# Altium PCB 160901137.PcbDoc
Units mm, origin at the board's own origin, x right, y up, seen from the top; angles counter-clockwise.
Board outline 150 x 90 mm, 2 copper layers (Top Layer, Bottom Layer); 112 components, 134 nets, 547 pads, 17 vias.
Unrouted connection lines stored in the file: 3.
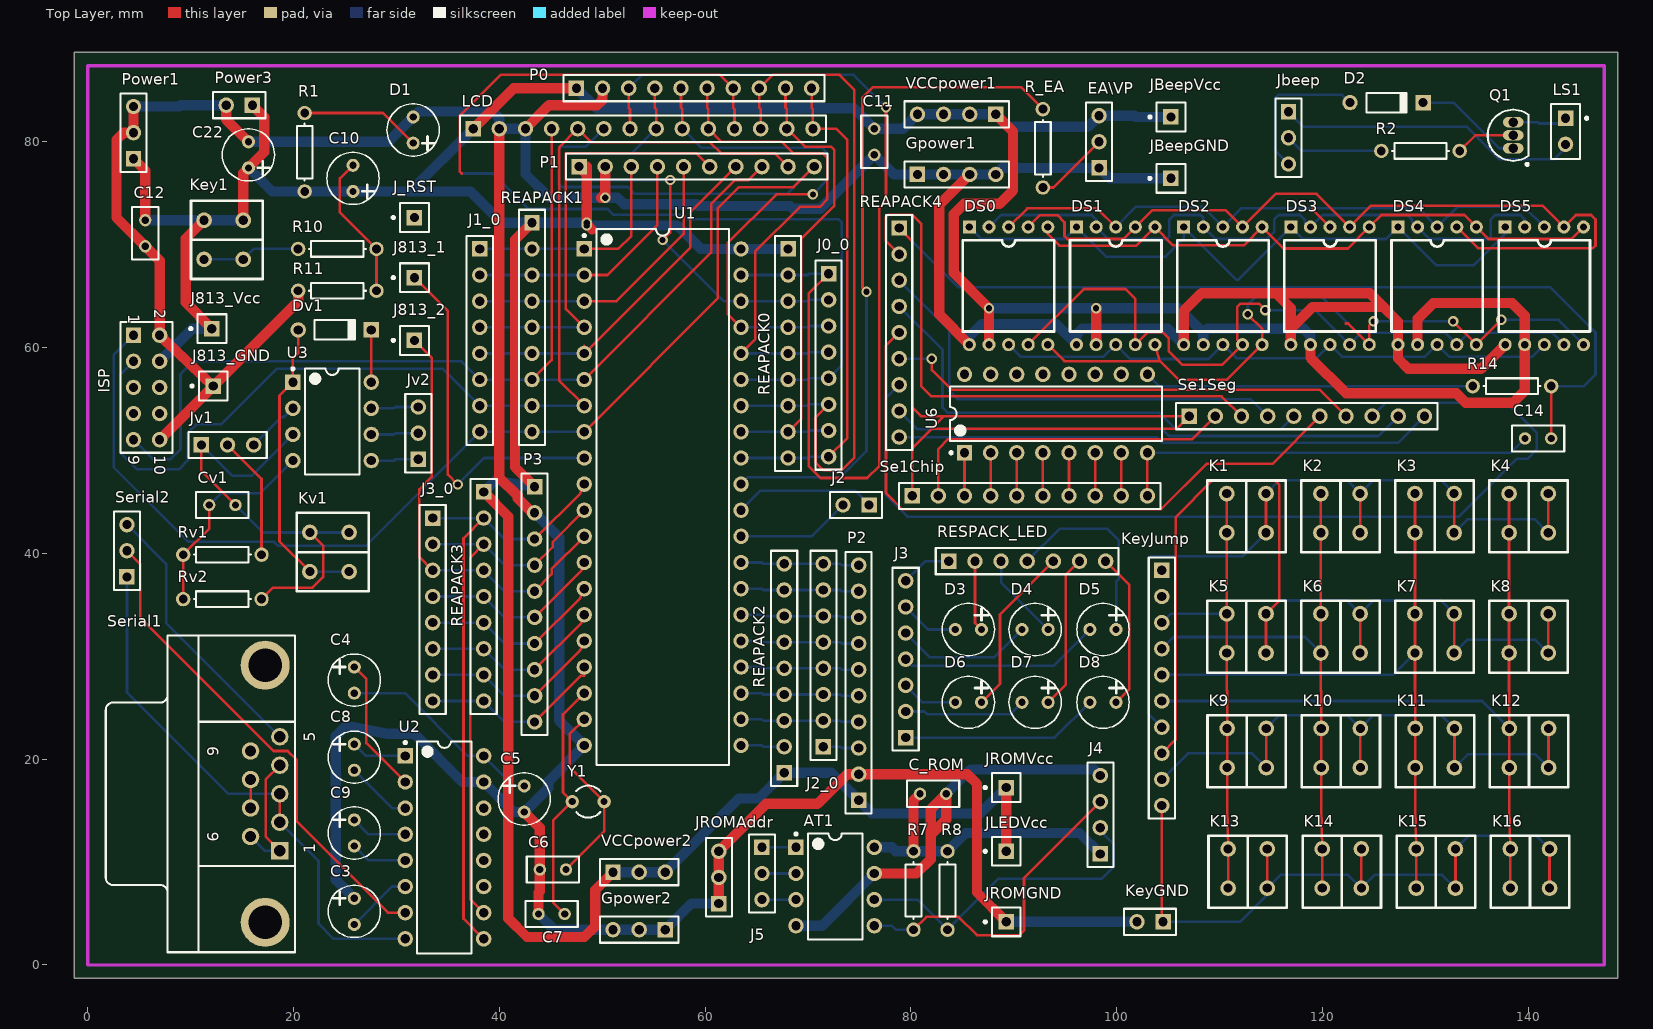
[diagram p0: Top Layer view]
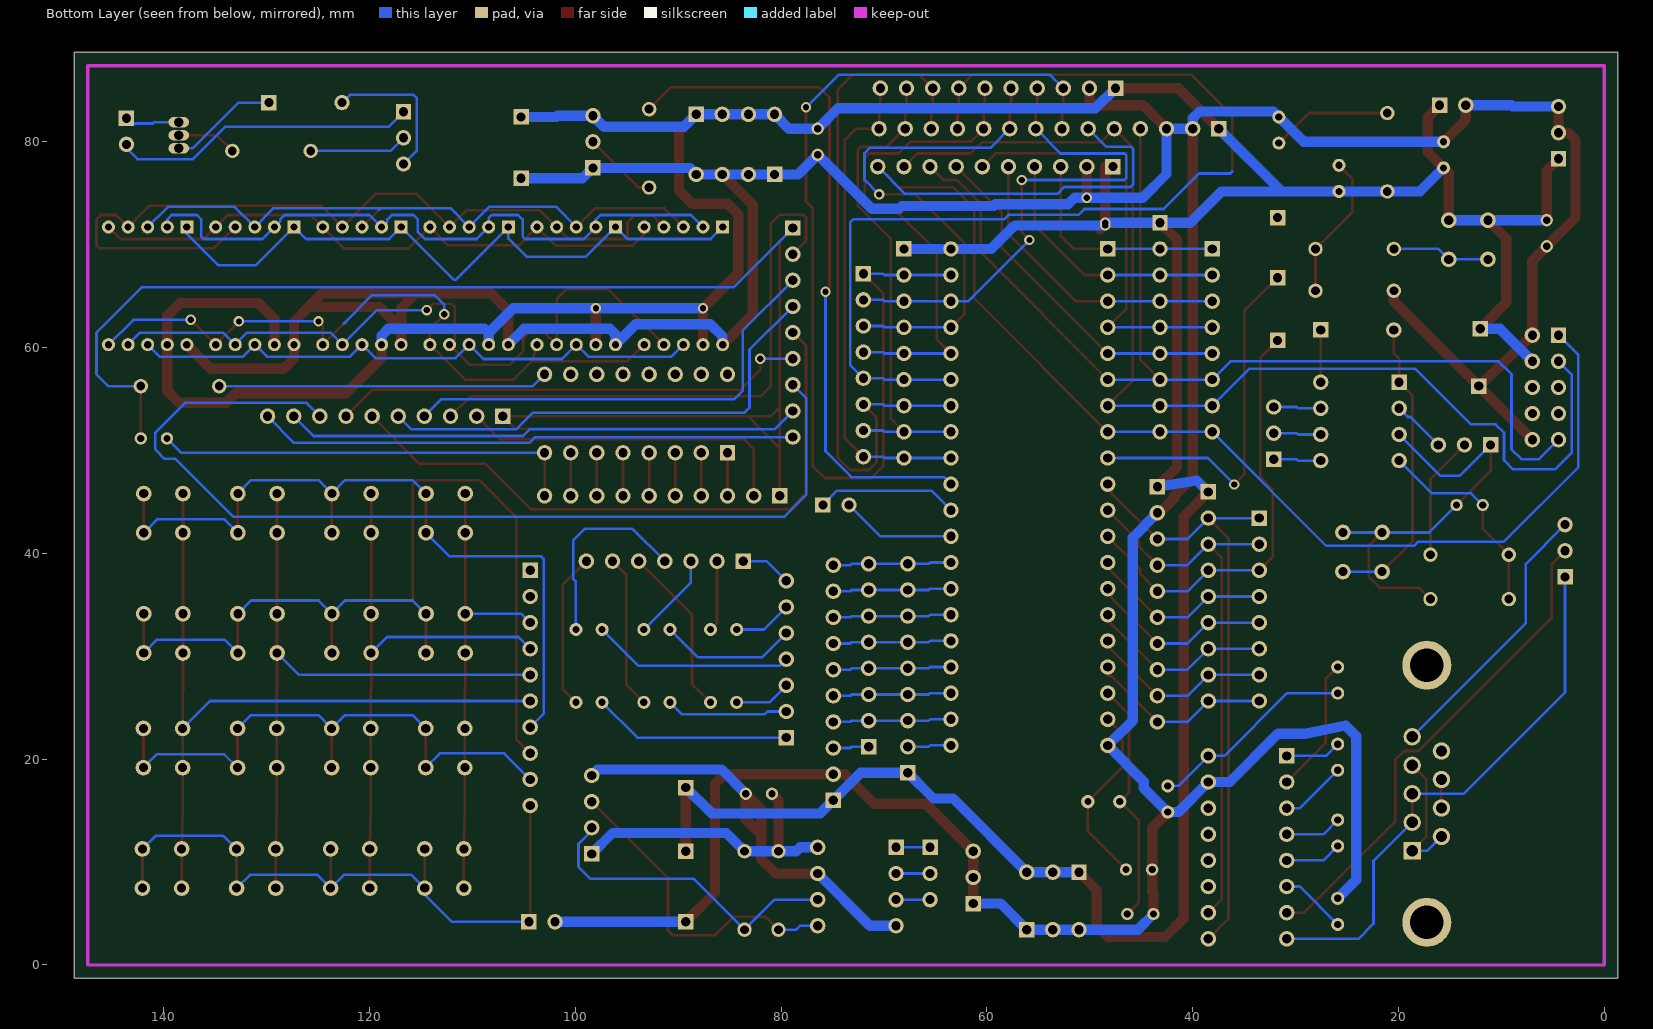
[diagram p1: Bottom Layer view, seen from below]

## Layer stack, top to bottom
Top Layer: signal copper 0.0356
Dielectric: dielectric 0.32, FR-4, Dk 4.8
Bottom Layer: signal copper 0.0356

## Board outline
-1.3,-1.3 148.7,-1.3 148.7,88.7 -1.3,88.7

## Design rules (kind name [scope] priority, off if disabled: settings)
Clearance [All] p1: gap=0.256
HoleSize [All] p1 off: absolutevalues=TRUE maxlimit=2.54 minlimit=0.025 maxpercent=80.000 minpercent=20.000
HoleToHoleClearance [All] p1 off: gap=0.254 allowstackedmicrovias=TRUE
LayerPairs [All] p1 off: enforce=TRUE
MinimumSolderMaskSliver [All] p1 off: minsoldermaskwidth=0.254
NetAntennae [All] p1 off: netantennaetolerance=0
PolygonConnect [All] p1: connectstyle=Relief reliefconductorwidth=0.254 reliefentries=4 polygonreliefangle="90 Angle" airgapwidth=0.254
RoutingVias [All] p1: holewidth=0.6 width=1 viastyle="Through Hole" minholewidth=0.711 minwidth=1.27 maxholewidth=0.711 maxwidth=1.27
SilkToSilkClearance [All] p1 off: silktosilkclearance=0.254
SilkToSolderMaskClearance [IsPad] p1 off: minsilkscreentomaskgap=0.254 clearancetoexposedcopper=TRUE
SolderMaskExpansion [All] p1: expansion=0.102
Width [InNetClass('New Class')] p1: maxlimit=1 minlimit=0.2 preferedwidth=1
21 further rules are at their usual default settings.

## Classes and differential pairs
net class "New Class 1": 7SEGGND 7SEGVCC ALE JNT0 JNT1 MISO MOSI NetAT1_1 NetAT1_2 NetAT1_3 NetC3_2 NetC4_1 NetC4_2 NetC6_2 NetC7_2 NetC8_1 NetC8_2 NetC9_1 NetC9_2 NetC10_2 NetC14_2 NetCv1_1 NetCv1_2 NetD1_1 NetD2_1 NetD2_2 NetD3_1 NetD3_2 NetD4_1 NetD4_2 NetD5_1 NetD5_2 NetD6_1 NetD6_2 NetD7_1 NetD7_2 NetD8_1 NetD8_2 NetDv1_1 NetDv1_2 NetEA\VP_2 NetJ3_7 NetJbeep_1 NetJbeep_2 NetJv1_2 NetJv1_3 NetJv2_1 NetJv2_2 NetJv2_3 NetK1_1 NetK1_2 NetK2_1 NetK3_1 NetK4_1 NetK5_2 NetK9_2 NetK13_2 NetKey1_1 NetLS1_1 NetQ1_2 NetR14_2 NetR_EA_2 NetREAPACK2_2 NetSe1Chip_3 NetSe1Chip_4 NetSe1Chip_5 NetSe1Chip_6 NetSe1Chip_7 NetSe1Chip_8 NetSe1Chip_9 NetSerial1_1 NetSerial1_2 NetSerial1_5 NetSerial1_7 NetSerial2_2 P00 P01 P02 P03 P04 P05 P06 P07 P10 P11 P12 P13 P14 P20 P21 P22 P23 P24 P25 P26 P27 PSFN RD RESET RST1 RXD SCK SCL SDA SE1SEG0 SE1SEG1 SE1SEG2 SE1SEG3 SE1SEG4 SE1SEG5 SE1SEG6 SE1SEG7 SELCHIP0 SELCHIP1 SELCHIP2 SELCHIP3 SELCHIP4 SELCHIP5 SELSEG0 SELSEG1 SELSEG2 SELSEG3 SELSEG4 SELSEG5 SELSEG6 SELSEG7 T0 T1 TXD WR
net class "New Class": EGND EVCC GND VCC

## Components (designator, comment, footprint, x,y, rotation, side; value= is the part's Value field where it differs from the comment)
AT1 "AT24C08" DIP-8 72.644,7.62 r0 top
C3 "Cap Pol1" RB0.1-0.2 25.908,6.477 r270 top
C4 "Cap Pol1" RB0.1-0.2 25.908,28.956 r270 top
C5 "Cap Pol1" RB0.1-0.2 42.418,17.399 r270 top
C6 "Cap" RAD-0.1 45.212,9.271 r0 top
C7 "Cap" RAD-0.1 45.085,4.953 r0 top
C8 "Cap Pol1" RB0.1-0.2 25.908,21.463 r270 top
C9 "Cap Pol1" RB0.1-0.2 25.908,14.097 r270 top
C10 "Cap Pol1" RB0.1-0.2 25.781,75.184 r90 top
C11 "Cap" RAD-0.1 76.454,80.01 r270 top
C12 "104" RAD-0.1 5.588,71.12 r270 top
C14 "104" RAD-0.1 140.97,51.181 r180 top
C22 "Cap Pol1" RB0.1-0.2 15.621,77.47 r90 top
C_ROM "Cap" RAD-0.1 82.169,16.637 r0 top
Cv1 "104" RAD-0.1 13.081,44.704 r0 top
D1 "Power" RB0.1-0.2 31.623,79.883 r90 top
D2 "Diode 1N4148" DO-35 126.238,83.82 r0 top
D3 "LED-mini" RB0.1-0.2 86.868,32.609 r180 top
D4 "LED-mini" RB0.1-0.2 93.345,32.609 r180 top
D5 "LED-mini" RB0.1-0.2 99.949,32.609 r180 top
D6 "LED-mini" RB0.1-0.2 86.868,25.527 r180 top
D7 "LED-mini" RB0.1-0.2 93.345,25.527 r180 top
D8 "LED-mini" RB0.1-0.2 99.949,25.527 r180 top
DS0 "Display" DISPLAY 85.695,71.725 r0 top
DS1 "Display" DISPLAY 96.109,71.725 r0 top
DS2 "Display" DISPLAY 106.523,71.725 r0 top
DS3 "Display" DISPLAY 116.937,71.725 r0 top
DS4 "Display" DISPLAY 127.351,71.725 r0 top
DS5 "Display" DISPLAY 137.765,71.725 r0 top
Dv1 "Diode 1N4148" DO-35 24.003,61.722 r0 top
EA\VP "Header 3" HDR1X3 98.298,77.47 r90 top
Gpower1 "Header 4" HDR1X4 80.645,76.835 r0 top
Gpower2 "Header 3" HDR1X3 56.134,3.429 r180 top
ISP "Header 5X2" HDR2X5 4.445,61.214 r270 top
J0_0 "CON8" HDR1X8 72.009,67.183 r270 top
J1_0 "CON8" HDR1X8 38.1,69.596 r270 top
J2 "Header 2" HDR1X2 75.946,44.704 r180 top
J2_0 "CON8" HDR1X8 71.501,21.209 r90 top
J3 "Header 7" HDR1X7 79.502,22.098 r90 top
J3_0 "CON8" HDR1X8 33.528,43.434 r270 top
J4 "Header 4" HDR1X4 98.425,10.795 r90 top
J5 "Header 3" HDR1X3 65.532,11.43 r270 top
J813_1 "CON1" PIN1 31.75,66.802 r90 top
J813_2 "CON1" PIN1 31.75,60.706 r90 top
J813_GND "CON1" PIN1 12.192,56.261 r90 top
J813_Vcc "CON1" PIN1 12.065,61.849 r90 top
J_RST "RST1" PIN1 31.75,72.644 r90 top
Jbeep "Header 3" HDR1X3 116.713,82.931 r270 top
JBeepGND "CON1" PIN1 105.283,76.454 r90 top
JBeepVcc "CON1" PIN1 105.283,82.423 r90 top
JLEDVcc "CON1" PIN1 89.281,11.049 r90 top
JROMAddr "Header 3" HDR1X3 61.341,5.969 r90 top
JROMGND "J_RST" PIN1 89.281,4.191 r90 top
JROMVcc "CON1" PIN1 89.281,17.242 r90 top
Jv1 "Header 3" HDR1X3 11.049,50.546 r0 top
Jv2 "Header 3" HDR1X3 32.131,49.149 r90 top
K1 "KEY-S" KEY 110.714,45.817 r0 top
K2 "KEY-S" KEY 119.858,45.817 r0 top
K3 "KEY-S" KEY 129.002,45.817 r0 top
K4 "KEY-S" KEY 138.146,45.817 r0 top
K5 "KEY-S" KEY 110.714,34.133 r0 top
K6 "KEY-S" KEY 119.858,34.133 r0 top
K7 "KEY-S" KEY 129.002,34.133 r0 top
K8 "KEY-S" KEY 138.146,34.133 r0 top
K9 "KEY-S" KEY 110.744,22.987 r0 top
K10 "KEY-S" KEY 119.888,22.987 r0 top
K11 "KEY-S" KEY 129.032,22.987 r0 top
K12 "KEY-S" KEY 138.176,22.987 r0 top
K13 "KEY-S" KEY 110.841,11.273 r0 top
K14 "KEY-S" KEY 119.985,11.273 r0 top
K15 "KEY-S" KEY 129.129,11.273 r0 top
K16 "KEY-S" KEY 138.273,11.273 r0 top
Key1 "RES" KEY 11.303,68.58 r90 top
KeyGND "Header 2" HDR1X2 104.521,4.191 r180 top
KeyJump "Header 10" HDR1X10 104.394,38.354 r270 top
Kv1 "HEY-H" KEY 21.59,38.227 r90 top
LCD "Header 14" HDR1X14 37.465,81.28 r0 top
LS1 "Speaker" PIN2 143.637,82.296 r270 top
P0 "Header 10" HDR1X10 47.498,85.217 r0 top
P1 "Header 10" HDR1X10 47.752,77.597 r0 top
P2 "Header 10" HDR1X10 74.93,16.002 r90 top
P3 "Header 10" HDR1X10 43.434,46.482 r270 top
Power1 "Header 3" HDR1X3 4.445,78.359 r90 top
Power3 "Header 2" HDR1X2 16.002,83.566 r180 top
Q1 "2N3906" TO-92A 138.557,80.645 r0 top
R1 "Res2" AXIAL-0.3 21.082,78.994 r90 top
R2 "Res2" AXIAL-0.3 129.54,79.121 r180 top
R7 "Res2" AXIAL-0.3 80.264,7.239 r90 top
R8 "Res2" AXIAL-0.3 83.566,7.239 r90 top
R10 "200" AXIAL-0.3 24.257,69.596 r180 top
R11 "Res2" AXIAL-0.3 24.257,65.532 r0 top
R14 "Res2" AXIAL-0.3 138.43,56.261 r180 top
R_EA "Res2" AXIAL-0.3 92.837,79.375 r90 top
REAPACK0 "4.7k*8" HDR1X9 68.072,69.596 r270 top
REAPACK1 "4.7k*8" HDR1X9 43.18,72.136 r270 top
REAPACK2 "4.7k*8" HDR1X9 67.691,18.669 r90 top
REAPACK3 "4.7k*8" HDR1X9 38.481,45.974 r270 top
REAPACK4 "4.7k*8" HDR1X9 78.867,71.628 r270 top
RESPACK_LED "Header 7" HDR1X7 83.693,39.243 r0 top
Rv1 "Res2" AXIAL-0.3 13.081,39.878 r0 top
Rv2 "Res2" AXIAL-0.3 13.081,35.56 r180 top
Se1Chip "Header 10" HDR1X10 80.137,45.593 r0 top
Se1Seg "Header 10" HDR1X10 107.061,53.34 r0 top
Serial1 "D Connector 9" DSUB1.385-2H9 7.747,16.637 r90 top
Serial2 "Header 3" HDR1X3 3.81,37.719 r90 top
U1 "AT89S52" DIP-40 55.88,45.466 r0 top
U2 "MAX232" DIP-16 34.671,11.43 r0 top
U3 "MAX813L" DIP-8 23.749,52.832 r0 top
U6 "ULN2003" DIP-16 94.107,53.594 r90 top
VCCpower1 "Header 4" HDR1X4 88.265,82.677 r180 top
VCCpower2 "Header 3" HDR1X3 51.054,9.017 r0 top
Y1 "11.0592M" R38 48.641,15.875 r90 top

## Footprints (in the part's own frame and the unit in brackets; to place one, negate y for a bottom-side part, rotate by r counter-clockwise, add the part's x,y. Pads: shape width x height; smd on the part's side, far side on the other; paste and mask are expansions set on the pad)
AXIAL-0.3 [mm] "Axial Device, Thru-Hole; 2 Leads; 0.3 in Pin Spacing"
  round 1.4 hole 0.85: 1(-3.81,0) 2(3.81,0)
  silkscreen extent -2.77,-0.76 2.77,0.76
DIP-8 [mm] "DIP; 8 Leads; Row Spacing 7.62 mm; Pitch 2.54 mm"
  rect 1.5x1.5 hole 0.9: 1(-3.81,3.81)
  round 1.5 hole 0.9: 2(-3.81,1.27) 3(-3.81,-1.27) 4(-3.81,-3.81) 5(3.81,-3.81) 6(3.81,-1.27) 7(3.81,1.27) 8(3.81,3.81)
  silkscreen extent -3.93,-5.15 2.65,5.23, body extent -3.6,-5.15 3.6,5.15, height 5.08
DIP-16 [mm] "DIP; 16 Leads; Row Spacing 7.62 mm; Pitch 2.54 mm"
  rect 1.5x1.5 hole 0.9: 1(-3.81,8.89)
  round 1.5 hole 0.9: 2(-3.81,6.35) 3(-3.81,3.81) 4(-3.81,1.27) 5(-3.81,-1.27) 6(-3.81,-3.81) 7(-3.81,-6.35) 8(-3.81,-8.89) 9(3.81,-8.89) 10(3.81,-6.35) 11(3.81,-3.81) 12(3.81,-1.27) 13(3.81,1.27) 14(3.81,3.81) 15(3.81,6.35) 16(3.81,8.89)
  silkscreen extent -3.93,-10.3 2.65,10.31, body extent -3.6,-10.28 3.6,10.28, height 5.08
DIP-40 [mm] "DIP, 40-Pin, Row Spacing 15.24 mm, Pitch 2.54 mm"
  rect 1.5x1.5 hole 0.9: 1(-7.62,24.13)
  round 1.5 hole 0.9: 2(-7.62,21.59) 3(-7.62,19.05) 4(-7.62,16.51) 5(-7.62,13.97) 6(-7.62,11.43) 7(-7.62,8.89) 8(-7.62,6.35) 9(-7.62,3.81) 10(-7.62,1.27) 11(-7.62,-1.27) 12(-7.62,-3.81) 13(-7.62,-6.35) 14(-7.62,-8.89) 15(-7.62,-11.43) 16(-7.62,-13.97) 17(-7.62,-16.51) 18(-7.62,-19.05) 19(-7.62,-21.59) 20(-7.62,-24.13) 21(7.62,-24.13) 22(7.62,-21.59) 23(7.62,-19.05) 24(7.62,-16.51) 25(7.62,-13.97) 26(7.62,-11.43) 27(7.62,-8.89) 28(7.62,-6.35) 29(7.62,-3.81) 30(7.62,-1.27) 31(7.62,1.27) 32(7.62,3.81) 33(7.62,6.35) 34(7.62,8.89) 35(7.62,11.43) 36(7.62,13.97) 37(7.62,16.51) 38(7.62,19.05) 39(7.62,21.59) 40(7.62,24.13)
  silkscreen extent -7.74,-26.05 6.45,26.05, body extent -7.42,-26.03 7.42,26.03, height 5.08
DISPLAY [mil]
  rect 50x50 hole 28: 1(0,0)
  round 50 hole 28: 2(75,0) 3(150,0) 4(225,0) 5(300,0) 6(300,-450) 7(225,-450) 8(150,-450) 9(75,-450) 10(0,-450)
  silkscreen extent -25,-400 325,-50
DO-35 [mm] "Diode, Axial; Body 3.8 x 1.9 mm (LxDia. max), Lead Dia. 0.53 mm (max)"
  round 1.5 hole 0.9: 1(-3.55,0)
  rect 1.5x1.5 hole 0.9: 2(3.55,0)
  silkscreen extent -1.95,-0.95 2.05,0.95
DSUB1.385-2H9 [mm] "Connector; D Subminiature; 9 Position; Right Angle; Pitch 1.385 mm"
  rect 1.69x1.69 hole 1.09: 1(-5.54,-10.92)
  round 1.69 hole 1.09: 2(-2.77,-10.92) 3(0,-10.92) 4(2.77,-10.92) 5(5.54,-10.92) 6(-4.155,-8.08) 7(-1.385,-8.08) 8(1.385,-8.08) 9(4.155,-8.08)
  round 4.76 hole 3.26: 10(-12.495,-9.5) 11(12.495,-9.5)
  silkscreen extent -15.4,-12.4 15.4,6
HDR1X2 [mm] "Connector; Header; 2 Position"
  rect 1.5x1.5 hole 0.9: 1(0,0)
  round 1.5 hole 0.9: 2(2.54,0)
  silkscreen extent -1.27,-1.27 3.81,1.27
HDR1X3 [mm] "Connector; Header; 3 Position"
  rect 1.5x1.5 hole 0.9: 1(0,0)
  round 1.5 hole 0.9: 2(2.54,0) 3(5.08,0)
  silkscreen extent -1.27,-1.27 6.35,1.27
HDR1X4 [mm] "Connector; Header; 4 Position"
  rect 1.5x1.5 hole 0.9: 1(0,0)
  round 1.5 hole 0.9: 2(2.54,0) 3(5.08,0) 4(7.62,0)
  silkscreen extent -1.27,-1.27 8.89,1.27
HDR1X7 [mm] "Connector; Header; 7 Position"
  rect 1.5x1.5 hole 0.9: 1(0,0)
  round 1.5 hole 0.9: 2(2.54,0) 3(5.08,0) 4(7.62,0) 5(10.16,0) 6(12.7,0) 7(15.24,0)
  silkscreen extent -1.27,-1.27 16.51,1.27
HDR1X8 [mm] "Connector; Header; 8 Position"
  rect 1.5x1.5 hole 0.9: 1(0,0)
  round 1.5 hole 0.9: 2(2.54,0) 3(5.08,0) 4(7.62,0) 5(10.16,0) 6(12.7,0) 7(15.24,0) 8(17.78,0)
  silkscreen extent -1.27,-1.27 19.05,1.27
HDR1X9 [mm] "Connector; Header; 9 Position"
  rect 1.5x1.5 hole 0.9: 1(0,0)
  round 1.5 hole 0.9: 2(2.54,0) 3(5.08,0) 4(7.62,0) 5(10.16,0) 6(12.7,0) 7(15.24,0) 8(17.78,0) 9(20.32,0)
  silkscreen extent -1.27,-1.27 21.59,1.27
HDR1X10 [mm] "Connector; Header; 10 Position"
  rect 1.5x1.5 hole 0.9: 1(0,0)
  round 1.5 hole 0.9: 2(2.54,0) 3(5.08,0) 4(7.62,0) 5(10.16,0) 6(12.7,0) 7(15.24,0) 8(17.78,0) 9(20.32,0) 10(22.86,0)
  silkscreen extent -1.27,-1.27 24.13,1.27
HDR1X14 [mm] "Connector; Header; 14 Position"
  rect 1.5x1.5 hole 0.9: 1(0,0)
  round 1.5 hole 0.9: 2(2.54,0) 3(5.08,0) 4(7.62,0) 5(10.16,0) 6(12.7,0) 7(15.24,0) 8(17.78,0) 9(20.32,0) 10(22.86,0) 11(25.4,0) 12(27.94,0) 13(30.48,0) 14(33.02,0)
  silkscreen extent -1.27,-1.27 34.29,1.27
HDR2X5 [mm] "Connector; Header; 5x2 Position"
  rect 1.5x1.5 hole 0.9: 1(0,0)
  round 1.5 hole 0.9: 2(0,2.54) 3(2.54,0) 4(2.54,2.54) 5(5.08,0) 6(5.08,2.54) 7(7.62,0) 8(7.62,2.54) 9(10.16,0) 10(10.16,2.54)
  silkscreen extent -1.27,-1.27 11.43,3.81
KEY [mil]
  round 60 hole 35: 1(0,0) 2(150,0) 3(0,-150) 4(150,-150)
  silkscreen extent -75,-225 225,50
PIN1 [mm] "Connector; Plug"
  rect 1.5x1.5 hole 0.9: 1(0,0)
  silkscreen extent -1.4,-1.4 1.4,2.17
PIN2 [mm] "Photosensitive Diode; 2 Leads"
  rect 1.5x1.5 hole 0.9: 1(0,0)
  round 1.5 hole 0.9: 2(2.54,0)
  silkscreen extent -1.4,-1.4 3.94,2.18
R38 [mm] "Crystal, Thru-Hole; 2 Leads; Body 3.1 x 8.2 mm (Dia.xH)"
  round 1.3 hole 0.7: 1(0,1.55) 2(0,-1.55)
  silkscreen extent -1.55,-1.19 1.55,1.17
RAD-0.1 [mm] "Radial Cap, Thru-Hole; 2 Leads; 0.1 in Pin Spacing"
  round 1.2 hole 0.7: 1(-1.27,0) 2(1.27,0)
  silkscreen extent -2.54,-1.27 2.54,1.27
RB0.1-0.2 [mil]
  round 50 hole 28: 1(0,0) 2(100,0)
  silkscreen extent -50,-100 150,100
TO-92A [mm] "TO, Flat Index; 3 In-Line, Axial Leads; Body Dia. 4.5mm; Leads 0.51 x 0.48 mm (max)"
  oval 2x1 hole 0.9: 1(0,-1.27) 2(0,0) 3(0,1.27)
  silkscreen extent -2.48,-2.95 1.5,2.48, body extent -2.5,-2.5 1.5,2.5, height 6.86

## Part data
C3 C4 C5 C8 C9 C10 C22: "Polarized Capacitor (Radial)"
C6 C7 C11 C_ROM: "Capacitor"
C12 C14 Cv1: library part Cap, "Capacitor"
D1: library part LED0, "Typical INFRARED GaAs LED"
D2 Dv1: "High Conductance Fast Diode"
EA\VP Gpower2 J5 Jbeep JROMAddr Jv1 Jv2 Power1 Serial2 VCCpower2: "Header, 3-Pin"
Gpower1 J4 VCCpower1: "Header, 4-Pin"
ISP: "Header, 5-Pin, Dual row"
J2 KeyGND Power3: "Header, 2-Pin"
J3 RESPACK_LED: "Header, 7-Pin"
J_RST JROMGND: library part CON1
Key1: library part KEY-H
KeyJump P0 P1 P2 P3 Se1Chip Se1Seg: "Header, 10-Pin"
LCD: "Header, 14-Pin"
LS1: "Loudspeaker"
Q1: "PNP General Purpose Amplifier"
R1 R2 R7 R8 R11 R14 R_EA Rv1 Rv2: "Resistor"
R10: library part Res2, "Resistor"
REAPACK0 REAPACK1 REAPACK2 REAPACK3 REAPACK4: library part Respack8-9
Serial1: "Receptacle Assembly, 9 Position, Right Angle"
Y1: library part XTAL, "Crystal Oscillator"

## Via types
v1: diameter 1, hole 0.6, Top Layer to Bottom Layer, 17 vias

## Nets (pads, with @x,y where several pads share a name; then routed paths per layer and width w, separated by ;. In a path a pad name is that pad's centre, name@x,y a point inside that pad or via, vN(x,y) a via of type N, cw(c..) or ccw(c..) an arc to the next point about the centre after c; other vN are vias at no path point)
7SEGGND: Se1Chip.2 Se1Seg.2 | length 32.8
  Top Layer w0.254: Se1Chip.2 82.677,50.14 83.638,51.1 107.361,51.1 Se1Seg.2
7SEGVCC: C14.1 R14.1 REAPACK4.1 Se1Chip.1 Se1Seg.1 | length 174.2
  Top Layer w0.254: REAPACK4.1 80.158,70.337 80.158,54.174 ; C14.1 R14.1 ; 80.158,50.262 80.137,50.241 Se1Chip.1 80.158,50.262 ; 80.158,50.262 80.158,54.174 ; 80.158,50.262 82.012,52.116 ; 80.158,54.174 80.991,53.34 83.236,53.34 ; 82.012,52.116 83.236,53.34 ; 82.012,52.116 105.837,52.116 Se1Seg.1 83.236,53.34
  Bottom Layer w0.254: REAPACK4.1 84.637,65.858 142.159,65.858 146.553,61.463 146.553,57.404 145.41,56.261 R14.1
ALE: J2.1 U1.30 | length 13.8
  Bottom Layer w0.254: U1.30 65.4,46.096 74.554,46.096 J2.1
EGND: AT1.4 AT1.7 C_ROM.2 J4.4 | length 43.6
  Top Layer w1: AT1.7 80.543,8.89 81.936,10.282 81.936,12.67 ; 81.936,12.67 81.936,15.134 C_ROM.2 83.439,14.173 81.936,12.67
  Bottom Layer w1: AT1.4 71.374,3.81 AT1.7 ; C_ROM.2 85.797,18.995 97.845,18.995 J4.4
EVCC: AT1.8 C_ROM.1 J4.1 R7.2 R8.2 | length 29.6
  Top Layer w1: R7.2 80.264,16.002 C_ROM.1
  Bottom Layer w1: AT1.8 78.151,11.43 78.532,11.049 R7.2 R8.2 85.339,12.822 96.398,12.822 J4.1
GND: C3.1 C5.2 C6.1 C7.1 C11.2 C12.2 C22.2 D1.2 DS0.10 DS1.10 DS2.10 DS3.10 DS4.10 DS5.10 EA\VP.1 Gpower1.1 Gpower1.2 Gpower1.3 Gpower1.4 Gpower2.1 Gpower2.2 Gpower2.3 ISP.2 ISP.10 J813_GND.1 JBeepGND.1 JROMAddr.1 JROMAddr.2 JROMAddr.3 JROMGND.1 KeyGND.2 LCD.2 LCD.3 P0.2 P1.2 P2.2 P3.2 Power1.2 Power1.3 Power3.2 R11.1 U1.20 U2.15 | length 483.2
  Top Layer w1: Power1.3 Power1.2 3.505,80.899 2.789,80.183 2.789,72.649 C12.2 6.985,68.453 ISP.2 7.692,60.507 J813_GND.1 ; ISP.10 J813_GND.1 ; Power3.2 13.462,82.169 C22.2 ; R11.1 20.447,64.516 J813_GND.1 ; LCD.2 40.005,47.371 41.784,45.592 41.784,45.359 43.201,43.942 P3.2 ; C5.2 43.942,13.335 C6.1 43.942,7.158 43.815,7.031 C7.1 ; LCD.3 44.826,83.561 49.5,83.561 50.038,84.099 P0.2 ; v1@49.906,74.57 v1@50.292,74.955 ; v1(50.292,74.57) v1@50.292,74.955 ; P1.2 v1@50.292,74.955 ; JROMAddr.1 JROMAddr.2 JROMAddr.3 65.959,15.667 70.938,15.667 73.812,18.542 P2.2 85.487,18.542 86.432,17.598 86.432,7.04 JROMGND.1 ; DS0.10 82.76,63.23 82.76,73.87 Gpower1.3 ; DS2.10 106.523,63.572 108.247,65.295 115.496,65.295 ; DS3.10 116.937,61.819 ; DS5.10 135.428,57.958 128.342,57.958 127.351,58.949 DS4.10 127.351,62.543 125.938,63.956 ; 115.496,65.295 124.598,65.295 125.938,63.956 ; 115.496,65.295 116.937,63.854 116.937,61.819 ; 116.937,61.819 119.074,63.956 125.938,63.956
  Bottom Layer w1: Power1.3 8.885,83.439 9.012,83.566 Power3.2 ; C22.2 29.21,80.01 D1.2 32.152,82.952 39.34,82.952 40.005,82.287 LCD.2 LCD.3 42.545,76.877 44.852,74.57 v1(50.292,74.57) 51.491,74.57 52.13,73.931 59.174,73.931 59.335,73.77 68.272,73.77 68.546,73.496 71.21,73.496 C11.2 78.359,76.835 Gpower1.1 Gpower1.2 Gpower1.3 Gpower1.4 88.9,77.47 EA\VP.1 99.314,76.454 JBeepGND.1 ; C3.1 24.1,8.285 24.1,22.246 25.116,23.262 29.078,22.474 31.72,22.474 36.414,17.78 U2.15 41.402,14.859 C5.2 44.75,17.191 44.75,17.826 U1.20 45.842,23.754 45.842,41.534 P3.2 ; C7.1 45.339,3.429 Gpower2.3 Gpower2.2 Gpower2.1 58.674,5.969 JROMAddr.1 ; DS0.10 85.695,61.082 86.889,62.276 94.128,62.276 DS1.10 96.109,61.311 96.642,61.844 104.974,61.844 DS2.10 ; JROMGND.1 KeyGND.2
JNT0: J3_0.3 J813_2.1 P3.5 REAPACK3.4 U1.12 | length 42.2
  Top Layer w0.254: J813_2.1 33.422,59.034 33.422,47.417 32.228,46.223 32.228,39.654 J3_0.3 ; P3.5 45.099,37.987 45.099,38.495 U1.12
  Bottom Layer w0.254: J3_0.3 REAPACK3.4 40.513,36.322 P3.5
JNT1: J3_0.4 P3.6 REAPACK3.5 U1.13 | length 18
  Top Layer w0.254: P3.6 47.976,38.324 U1.13
  Bottom Layer w0.254: J3_0.4 REAPACK3.5 40.513,33.782 P3.6
MISO: ISP.3 J1_0.7 LCD.5 P1.9 REAPACK1.8 U1.7 | length 112.9
  Top Layer w0.254: U1.7 45.821,56.795 45.821,79.476 LCD.5 48.95,79.955 60.503,79.955 61.583,78.874 66.795,78.874 P1.9
  Bottom Layer w0.254: ISP.3 3.168,57.397 3.168,49.779 4.768,48.179 8.86,48.179 9.749,49.068 9.749,51.735 10.562,52.548 12.975,52.548 18.36,57.933 34.523,57.933 J1_0.7 REAPACK1.8 U1.7
MOSI: ISP.9 J1_0.6 LCD.4 P1.8 REAPACK1.7 U1.6 | length 107.3
  Top Layer w0.254: REAPACK1.7 45.085,58.801 LCD.4 ; U1.6 60.593,69.229 60.593,73.96 62.93,76.297 64.232,76.297 P1.8
  Bottom Layer w0.254: ISP.9 6.338,49.161 8.063,49.161 9.012,50.11 9.012,57.425 10.257,58.669 36.327,58.669 J1_0.6 REAPACK1.7 U1.6
NetAT1_1: AT1.1 J5.1 | length 3.3
  Bottom Layer w0.254: J5.1 AT1.1
NetAT1_2: AT1.2 J5.2 | length 3.3
  Bottom Layer w0.254: J5.2 AT1.2
NetAT1_3: AT1.3 J5.3 | length 3.3
  Bottom Layer w0.254: J5.3 AT1.3
NetC3_2: C3.2 U2.6 | length 6.5
  Bottom Layer w0.254: C3.2 29.591,7.62 U2.6
NetC4_1: C4.1 U2.2 | length 13.2
  Top Layer w0.254: C4.1 27.072,27.792 27.072,21.569 U2.2
NetC4_2: C4.2 C5.1 U2.16 | length 20.2
  Bottom Layer w0.254: C4.2 30.821,26.416 36.917,20.32 U2.16 41.402,17.399 C5.1
NetC6_2: C6.2 U1.19 Y1.2 | length 18.7
  Top Layer w0.254: C6.2 50.191,12.98 Y1.2 46.858,19.208 46.858,21.89 46.858,22.474 U1.19 U1.19@48.26,23.292
NetC7_2: C7.2 U1.18 Y1.1 | length 23.9
  Top Layer w0.254: C7.2 45.233,6.075 45.233,14.017 Y1.1 46.198,16.768 46.198,24.354 U1.18
NetC8_1: C8.1 U2.1 | length 5.4
  Bottom Layer w0.254: C8.1 27.051,20.32 U2.1
NetC8_2: C8.2 U2.3 | length 6.5
  Bottom Layer w0.254: C8.2 29.591,15.24 U2.3
NetC9_1: C9.1 U2.4 | length 5.5
  Bottom Layer w0.254: C9.1 27.305,12.7 U2.4
NetC9_2: C9.2 U2.5 | length 5.5
  Bottom Layer w0.254: C9.2 27.305,10.16 U2.5
NetC10_2: C10.2 R10.1 R11.2 | length 14.2
  Top Layer w0.254: C10.2 24.506,76.449 24.506,73.157 R10.1 R11.2
NetC14_2: C14.2 Se1Chip.10 U6.8 | length 41.5
  Top Layer w0.254: Se1Chip.10 U6.8
  Bottom Layer w0.254: U6.8 138.303,49.784 C14.2
NetCv1_1: Cv1.1 Rv1.1 Rv2.2 U3.4 | length 20.1
  Top Layer w0.254: Rv2.2 Rv1.1 11.811,42.418 Cv1.1
  Bottom Layer w0.254: Cv1.1 12.949,45.842 16.759,45.842 U3.4
NetCv1_2: Cv1.2 Jv1.1 Kv1.2 Kv1.4 Rv2.1 U3.3 | length 42.9
  Top Layer w0.254: Jv1.1 11.049,48.006 Cv1.2 ; Rv2.1 18.004,36.673 21.865,36.673 22.881,37.689 22.881,40.746 Kv1.2
  Bottom Layer w0.254: Jv1.1 14.051,47.544 15.921,47.544 U3.3 ; Cv1.2 17.018,42.037 Kv1.2 Kv1.4
NetD1_1: D1.1 R1.2 | length 11.8
  Top Layer w0.254: R1.2 28.702,82.804 D1.1
NetD2_1: D2.1 Jbeep.3 | length 14.7
  Bottom Layer w0.254: Jbeep.3 115.413,79.151 115.413,84.247 115.743,84.577 121.931,84.577 D2.1
NetD2_2: D2.2 Q1.1 | length 10.6
  Bottom Layer w0.254: D2.2 132.761,83.82 137.206,79.375 Q1.1
NetD3_1: D3.1 RESPACK_LED.2 | length 6.9
  Top Layer w0.254: RESPACK_LED.2 86.233,33.244 D3.1
NetD3_2: D3.2 J3.6 | length 5.7
  Bottom Layer w0.254: J3.6 81.691,32.609 D3.2
NetD4_1: D4.1 RESPACK_LED.3 | length 8.5
  Bottom Layer w0.254: RESPACK_LED.3 88.773,37.181 D4.1
NetD4_2: D4.2 J3.5 | length 13.4
  Bottom Layer w0.254: J3.5 81.869,29.891 88.087,29.891 D4.2
NetD5_1: D5.1 RESPACK_LED.4 | length 19.5
  Bottom Layer w0.254: RESPACK_LED.4 94.483,42.413 99.081,42.413 100.224,41.27 100.224,37.537 99.949,37.262 D5.1
NetD5_2: D5.2 J3.4 | length 19.6
  Bottom Layer w0.254: J3.4 80.142,29.078 93.878,29.078 D5.2
NetD6_1: D6.1 RESPACK_LED.5 | length 16.6
  Top Layer w0.254: D6.1 88.667,27.326 88.667,34.057 RESPACK_LED.5
NetD6_2: D6.2 J3.3 | length 5.5
  Bottom Layer w0.254: J3.3 81.153,25.527 D6.2
NetD7_1: D7.1 RESPACK_LED.6 | length 15
  Top Layer w0.254: D7.1 95.042,27.224 95.042,37.892 RESPACK_LED.6
NetD7_2: D7.2 J3.2 | length 11.9
  Bottom Layer w0.254: J3.2 81.326,24.638 81.61,24.354 89.632,24.354 D7.2
NetD8_1: D8.1 RESPACK_LED.7 | length 15.2
  Top Layer w0.254: RESPACK_LED.7 101.214,36.962 101.214,26.792 D8.1
NetD8_2: D8.2 J3.1 | length 19.3
  Bottom Layer w0.254: J3.1 93.98,22.098 D8.2
NetDv1_1: Dv1.1 Kv1.1 Kv1.3 U3.1 | length 29.3
  Top Layer w0.254: Dv1.1 20.453,59.437 19.939,58.923 U3.1 18.639,55.342 18.639,41.178 Kv1.1
  Bottom Layer w0.254: Kv1.1 Kv1.3
NetDv1_2: Dv1.2 U3.8 | length 5.1
  Top Layer w0.254: Dv1.2 27.553,59.183 27.559,59.177 U3.8
NetEA\VP_2: EA\VP.2 R_EA.1 | length 7.3
  Top Layer w0.254: R_EA.1 93.853,75.565 EA\VP.2
NetJ3_7: J3.7 RESPACK_LED.1 | length 5
  Bottom Layer w0.254: J3.7 81.407,39.243 RESPACK_LED.1
NetJbeep_1: Jbeep.1 LS1.2 | length 29.1
  Bottom Layer w0.254: Jbeep.1 118.191,81.453 134.057,81.453 137.185,78.325 142.587,78.325 LS1.2@143.51,79.248
NetJbeep_2: Jbeep.2 R2.2 | length 9.5
  Bottom Layer w0.254: Jbeep.2 117.983,79.121 R2.2
NetJv1_2: Jv1.2 Rv1.2 | length 12
  Top Layer w0.254: Jv1.2 16.891,47.244 Rv1.2
NetJv1_3: Jv1.3 U3.2 | length 5.3
  Bottom Layer w0.254: Jv1.3 18.842,53.259 19.096,53.259 U3.2
NetJv2_1: Jv2.1 U3.5 | length 4.6
  Bottom Layer w0.254: U3.5 29.764,49.022 29.891,49.149 Jv2.1
NetJv2_2: Jv2.2 U3.6 | length 4.6
  Bottom Layer w0.254: U3.6 29.764,51.562 29.891,51.689 Jv2.2
NetJv2_3: Jv2.3 U3.7 | length 4.6
  Bottom Layer w0.254: U3.7 29.764,54.102 29.891,54.229 Jv2.3
NetK1_1: K1.1 K1.3 K5.1 K5.3 K9.1 K9.3 K13.1 K13.3 KeyJump.3 | length 45
  Top Layer w0.254: K1.1 K1.3 K5.1 K5.3 110.714,26.67 110.744,26.64 K9.1 K9.3 110.744,15.307 K13.1 K13.3
  Bottom Layer w0.254: KeyJump.3 105.253,34.133 K5.1
NetK1_2: K1.2 K1.4 K2.2 K2.4 K3.2 K3.4 K4.2 K4.4 KeyJump.7 | length 75.3
  Top Layer w0.254: K1.4 K1.2 ; K2.4 K2.2 ; K3.4 K3.2 ; K4.4 K4.2
  Bottom Layer w0.254: KeyJump.7 103.094,24.414 103.094,39.467 103.348,39.721 112.238,39.721 K1.4 ; K1.2 115.819,47.112 122.373,47.112 K2.2 124.963,47.112 131.517,47.112 K3.2 ; K3.4 134.107,43.302 140.661,43.302 K4.4
NetK2_1: K2.1 K2.3 K6.1 K6.3 K10.1 K10.3 K14.1 K14.3 KeyJump.4 | length 54.9
  Top Layer w0.254: K2.1 K2.3 K6.1 K6.3 119.858,26.67 119.888,26.64 K10.1 K10.3 119.888,15.307 K14.1 K14.3
  Bottom Layer w0.254: KeyJump.4 105.532,31.872 118.309,31.872 K6.3
NetK3_1: K3.1 K3.3 K7.1 K7.3 K11.1 K11.3 K15.1 K15.3 KeyJump.5 | length 63.9
  Top Layer w0.254: K3.1 K3.3 K7.1 K7.3 129.002,26.67 129.032,26.64 K11.1 K11.3 129.032,15.307 K15.1 K15.3
  Bottom Layer w0.254: KeyJump.5 126.873,28.194 K7.3
NetK4_1: K4.1 K4.3 K8.1 K8.3 K12.1 K12.3 K16.1 K16.3 KeyJump.6 | length 73.3
  Top Layer w0.254: K4.1 K4.3 K8.1 K8.3 138.146,26.67 138.176,26.64 K12.1 K12.3 138.176,15.307 K16.1 K16.3
  Bottom Layer w0.254: KeyJump.6 135.509,25.654 K12.1
NetK5_2: K5.2 K5.4 K6.2 K6.4 K7.2 K7.4 K8.2 K8.4 KeyJump.8 | length 94.2
  Top Layer w0.254: KeyJump.8 105.736,21.916 105.736,43.506 109.342,47.112 115.337,47.112 115.819,46.63 115.819,35.428 K5.2 K5.4 ; K6.4 K6.2 ; K7.4 K7.2 ; K8.4 K8.2
  Bottom Layer w0.254: K5.2 115.819,35.428 122.373,35.428 K6.2 124.963,35.428 131.517,35.428 K7.2 ; K7.4 134.107,31.618 140.661,31.618 K8.4
NetK9_2: K9.2 K9.4 K10.2 K10.4 K11.2 K11.4 K12.2 K12.4 KeyJump.9 | length 57.7
  Top Layer w0.254: K9.4 K9.2 ; K10.4 K10.2 ; K11.4 K11.2 ; K12.4 K12.2
  Bottom Layer w0.254: KeyJump.9 106.929,20.569 113.162,20.569 K9.4 ; K9.2 115.845,24.278 122.407,24.278 K10.2 124.989,24.278 131.551,24.278 K11.2 ; K11.4 134.133,20.468 140.695,20.468 K12.4
NetK13_2: K13.2 K13.4 K14.2 K14.4 K15.2 K15.4 K16.2 K16.4 KeyGND.1 KeyJump.10 | length 69.1
  Top Layer w0.254: KeyJump.10 104.394,4.318 KeyGND.1 ; K13.4 K13.2 ; K14.4 K14.2 ; K15.4 K15.2 ; K16.4 K16.2
  Bottom Layer w0.254: KeyGND.1 112.014,4.191 114.651,6.828 K13.4 115.946,8.758 122.5,8.758 K14.4 125.09,8.758 131.644,8.758 K15.4 ; K15.2 134.234,12.568 140.788,12.568 K16.2
NetKey1_1: Key1.1 Key1.3 R10.2 | length 9.6
  Bottom Layer w0.254: Key1.1 Key1.3 16.129,69.596 R10.2
NetLS1_1: LS1.1 Q1.3 | length 5
  Bottom Layer w0.254: Q1.3 140.965,81.915 141.092,81.788 LS1.1@143.51,81.788
NetQ1_2: Q1.2 R2.1 | length 5.8
  Top Layer w0.254: R2.1 134.874,80.645 Q1.2
NetR14_2: R14.2 U6.9 | length 32.1
  Bottom Layer w0.254: U6.9 104.14,56.261 R14.2
NetR_EA_2: R_EA.2 U1.31 | length 66.9
  Top Layer w0.254: v1(75.687,65.426) 75.306,65.807 75.306,84.298 76.322,85.314 90.708,85.314 R_EA.2
  Bottom Layer w0.254: U1.31 64.181,47.417 73.173,47.417 75.687,49.932 v1(75.687,65.426)
NetREAPACK2_2: REAPACK2.2 U1.21 | length 4.2
  Bottom Layer w0.254: U1.21 65.527,21.336 65.654,21.209 REAPACK2.2
NetSe1Chip_3: Se1Chip.3 U6.1 | length 4.2
  Top Layer w0.254: Se1Chip.3 U6.1
NetSe1Chip_4: Se1Chip.4 U6.2 | length 4.2
  Top Layer w0.254: Se1Chip.4 U6.2
NetSe1Chip_5: Se1Chip.5 U6.3 | length 4.2
  Top Layer w0.254: Se1Chip.5 U6.3
NetSe1Chip_6: Se1Chip.6 U6.4 | length 4.2
  Top Layer w0.254: Se1Chip.6 U6.4
NetSe1Chip_7: Se1Chip.7 U6.5 | length 4.2
  Top Layer w0.254: Se1Chip.7 U6.5
NetSe1Chip_8: Se1Chip.8 U6.6 | length 4.2
  Top Layer w0.254: Se1Chip.8 U6.6
NetSe1Chip_9: Se1Chip.9 U6.7 | length 4.2
  Top Layer w0.254: Se1Chip.9 U6.7
NetSerial1_1: Serial1.1 Serial1.4 Serial1.6 | length 12.9
  Top Layer w0.254: Serial1.1 17.293,12.471 17.293,18.033 Serial1.4
  Bottom Layer w0.254: Serial1.6 17.212,11.097 Serial1.1
NetSerial1_2: Serial1.2 Serial1.3 Serial2.1 U2.8 | length 53.4
  Top Layer w0.254: Serial1.2 Serial1.3
  Bottom Layer w0.254: Serial2.1 3.81,26.488 13.661,16.637 Serial1.3 ; Serial1.2 22.424,10.11 22.424,4.009 23.892,2.54 U2.8
NetSerial1_5: Serial1.5 Serial2.3 | length 26.8
  Bottom Layer w0.254: Serial2.3 7.615,38.994 7.615,33.229 Serial1.5
NetSerial1_7: Serial1.7 Serial1.8 | length 2.8
  Top Layer w0.254: Serial1.7 Serial1.8
NetSerial2_2: Serial2.2 U2.7 | length 48.2
  Top Layer w0.254: Serial2.2 5.101,38.968 5.101,33.752 18.055,20.798 19.426,20.798 20.315,19.909 20.315,13.94 29.175,5.08 U2.7
P00: J0_0.1 LCD.7 P0.3 REAPACK0.2 U1.39 | length 101.8
  Top Layer w0.254: P0.3 52.578,83.307 52.705,83.18 LCD.7 ; J0_0.1 70.078,65.252 70.078,48.484 71.232,47.33 75.753,47.33 76.936,48.513 76.936,73.559 77.592,74.215 v1(77.592,83.358)
  Bottom Layer w0.254: P0.3 53.869,86.508 74.443,86.508 v1(77.592,83.358) ; U1.39 REAPACK0.2 69.972,67.056 70.099,67.183 J0_0.1
P01: J0_0.2 LCD.8 P0.4 REAPACK0.3 U1.38 | length 51.8
  Top Layer w0.254: P0.4 55.118,83.307 55.245,83.18 LCD.8 ; v1(55.875,70.455) 56.612,71.192 v1(56.612,76.297) ; U1.38 U1.38@63.5,65.25
  Bottom Layer w0.254: LCD.8 52.839,78.874 46.655,78.874 46.452,78.671 46.452,76.5 46.655,76.297 v1(56.612,76.297) ; v1(55.875,70.455) 61.814,64.516 U1.38 REAPACK0.3 69.972,64.516 70.099,64.643 J0_0.2
P02: J0_0.3 LCD.9 P0.5 REAPACK0.4 U1.37 | length 51.2
  Top Layer w0.254: P0.5 57.658,83.307 57.785,83.18 LCD.9 ; U1.37 62.2,63.276 62.2,70.176 66.924,74.9 v1(70.48,74.9)
  Bottom Layer w0.254: LCD.9 59.618,79.447 71.344,79.447 71.903,78.888 71.903,76.322 v1(70.48,74.9) ; U1.37 REAPACK0.4 69.972,61.976 70.099,62.103 J0_0.3
P03: J0_0.4 LCD.10 P0.6 REAPACK0.5 U1.36 | length 48.9
  Top Layer w0.254: P0.6 60.198,83.307 60.325,83.18 LCD.10 61.602,80.003 67.458,80.003 68.587,78.874 71.446,78.874 71.889,78.431 71.889,74.427 71.152,73.69 69.206,73.69 64.892,69.377 64.892,60.828 U1.36
  Bottom Layer w0.254: U1.36 REAPACK0.5 69.972,59.436 70.099,59.563 J0_0.4
P04: J0_0.5 LCD.11 P0.7 REAPACK0.6 U1.35 | length 101.9
  Top Layer w0.254: 36.343,76.932 36.165,77.11 36.165,82.545 40.127,86.508 61.447,86.508 P0.7 62.738,83.307 62.865,83.18 LCD.11
  Bottom Layer w0.254: 36.165,77.11 36.343,76.932 39.365,76.932 42.82,73.478 50.529,73.478 51.103,72.904 57.918,72.904 58.353,72.469 73.013,72.469 73.3,72.182 73.3,58.314 J0_0.5 70.099,57.023 69.972,56.896 REAPACK0.6 U1.35
P05: J0_0.6 LCD.12 P0.8 REAPACK0.7 U1.34 | length 69.4
  Top Layer w0.254: LCD.12 65.405,83.18 65.278,83.307 P0.8 66.569,86.508 73.071,86.508 74.494,85.085 74.494,49.297 73.3,48.103 71.471,48.103 70.732,48.842 70.732,53.206 J0_0.6
  Bottom Layer w0.254: U1.34 REAPACK0.7 69.972,54.356 70.099,54.483 J0_0.6
P06: J0_0.7 LCD.13 P0.9 REAPACK0.8 U1.33 | length 47.3
  Top Layer w0.254: P0.9 67.818,83.307 67.945,83.18 LCD.13 69.697,79.528 72.258,79.528 72.543,79.243 72.543,73.773 69.363,70.593 69.363,53.107 REAPACK0.8
  Bottom Layer w0.254: U1.33 REAPACK0.8 69.972,51.816 70.099,51.943 J0_0.7
P07: J0_0.8 LCD.14 P0.10 REAPACK0.9 U1.32 | length 47.9
  Top Layer w0.254: P0.10 70.358,83.307 70.485,83.18 LCD.14 72.736,81.28 73.833,80.183 73.833,51.227 J0_0.8
  Bottom Layer w0.254: U1.32 REAPACK0.9 69.972,49.276 70.099,49.403 J0_0.8
P10: J1_0.1 P1.3 REAPACK1.2 U1.1 | length 22
  Top Layer w0.254: U1.1 51.562,69.596 52.832,70.866 P1.3
  Bottom Layer w0.254: J1_0.1 REAPACK1.2 U1.1
P11: J1_0.2 P1.4 REAPACK1.3 U1.2 | length 25
  Top Layer w0.254: U1.2 50.523,67.056 55.372,71.905 P1.4
  Bottom Layer w0.254: J1_0.2 REAPACK1.3 U1.2
P12: J1_0.3 P1.5 REAPACK1.4 U1.3 | length 29.1
  Top Layer w0.254: U1.3 51.389,64.516 57.912,71.039 P1.5
  Bottom Layer w0.254: J1_0.3 REAPACK1.4 U1.3
P13: J1_0.4 P1.6 REAPACK1.5 U1.4 | length 42.3
  Top Layer w0.254: U1.4 46.475,63.761 46.475,78.888 59.161,78.888 P1.6
  Bottom Layer w0.254: J1_0.4 REAPACK1.5 U1.4
P14: J1_0.5 P1.7 REAPACK1.6 U1.5 | length 35.2
  Top Layer w0.254: U1.5@48.26,60.17 U1.5 58.566,69.742 58.566,70.476 58.566,73.171 P1.7
  Bottom Layer w0.254: J1_0.5 REAPACK1.6 U1.5
P20: J2_0.1 P2.3 | length 3.5
  Bottom Layer w0.254: J2_0.1 73.147,21.209 73.274,21.082 P2.3
P21: J2_0.2 P2.4 REAPACK2.3 U1.22 | length 11.5
  Bottom Layer w0.254: U1.22 65.527,23.876 65.654,23.749 REAPACK2.3 J2_0.2 73.147,23.749 73.274,23.622 P2.4
P22: J2_0.3 P2.5 REAPACK2.4 U1.23 | length 11.5
  Bottom Layer w0.254: U1.23 65.527,26.416 65.654,26.289 REAPACK2.4 J2_0.3 73.147,26.289 73.274,26.162 P2.5
P23: J2_0.4 P2.6 REAPACK2.5 U1.24 | length 11.5
  Bottom Layer w0.254: U1.24 65.527,28.956 65.654,28.829 REAPACK2.5 J2_0.4 73.147,28.829 73.274,28.702 P2.6
P24: J2_0.5 P2.7 REAPACK2.6 U1.25 | length 11.5
  Bottom Layer w0.254: U1.25 65.527,31.496 65.654,31.369 REAPACK2.6 J2_0.5 73.147,31.369 73.274,31.242 P2.7
P25: J2_0.6 P2.8 REAPACK2.7 U1.26 | length 11.5
  Bottom Layer w0.254: U1.26 65.527,34.036 65.654,33.909 REAPACK2.7 J2_0.6 73.147,33.909 73.274,33.782 P2.8
P26: J2_0.7 P2.9 REAPACK2.8 U1.27 | length 11.5
  Bottom Layer w0.254: U1.27 65.527,36.576 65.654,36.449 REAPACK2.8 J2_0.7 73.147,36.449 73.274,36.322 P2.9
P27: J2_0.8 P2.10 REAPACK2.9 U1.28 | length 11.5
  Bottom Layer w0.254: U1.28 65.527,39.116 65.654,38.989 REAPACK2.9 J2_0.8 73.147,38.989 73.274,38.862 P2.10
PSFN: J2.2 U1.29 | length 11.2
  Bottom Layer w0.254: U1.29 70.358,41.656 J2.2
RD: J3_0.8 P3.10 REAPACK3.9 U1.17 | length 18.3
  Top Layer w0.254: P3.10 47.925,28.113 48.26,28.113 U1.17
  Bottom Layer w0.254: J3_0.8 REAPACK3.9 40.513,23.622 P3.10
RESET: J813_1.1 U1.9 | length 35.2
  Top Layer w0.254: J813_1.1 34.997,63.555 34.997,47.671 v1(35.962,46.706)
  Bottom Layer w0.254: v1(35.962,46.706) 38.532,49.276 U1.9
RST1: ISP.5
RXD: J3_0.1 P3.3 REAPACK3.2 U1.10 U2.9 | length 60.5
  Top Layer w0.254: U2.9 36.521,4.5 36.521,41.474 REAPACK3.2 ; P3.3 47.874,45.842 U1.10
  Bottom Layer w0.254: J3_0.1 REAPACK3.2 40.513,41.402 P3.3
SCK: ISP.1 J1_0.8 LCD.6 P1.10 REAPACK1.9 U1.8 | length 140.2
  Top Layer w0.254: U1.8 61.247,64.803 61.247,73.566 63.282,75.601 68.616,75.601 P1.10
  Bottom Layer w0.254: ISP.1 2.514,59.283 2.514,48.375 9.771,41.118 18.106,41.118 18.487,40.737 27.021,40.737 J1_0.8 REAPACK1.9 U1.8 ; LCD.6 48.413,79.528 46.046,79.528 45.767,79.249 45.767,75.89 46.046,75.611 52.504,75.611 53.157,74.958 67.973,74.958 P1.10
SCL: AT1.6 J4.2 R8.1 | length 31.3
  Bottom Layer w0.254: AT1.6 80.645,6.35 R8.1 88.519,8.382 98.566,8.382 99.702,9.518 99.702,11.763 98.425,13.04 J4.2
SDA: AT1.5 J4.3 R7.1 | length 31.7
  Top Layer w0.254: R7.1 81.504,4.669 84.654,4.669 86.432,2.891 90.546,2.891 91.004,3.348 91.004,8.454 J4.3
  Bottom Layer w0.254: AT1.5 78.151,3.81 78.532,3.429 R7.1
SE1SEG0: REAPACK4.2 Se1Seg.3 | length 56.1
  Top Layer w0.254: REAPACK4.2 77.59,70.365 77.59,72.665 77.844,72.919 80.132,72.919 80.996,72.055 80.996,56.287 82.012,55.271 110.21,55.271 Se1Seg.3
SE1SEG1: REAPACK4.3 Se1Seg.4 | length 44.7
  Bottom Layer w0.254: REAPACK4.3 83.739,61.676 83.739,55.799 84.552,54.986 113.035,54.986 Se1Seg.4
SE1SEG2: REAPACK4.4 Se1Seg.5 | length 47.1
  Bottom Layer w0.254: REAPACK4.4 83.079,59.796 83.079,54.174 83.561,53.691 104.133,53.691 105.761,52.063 115.944,52.063 Se1Seg.5
SE1SEG3: REAPACK4.5 Se1Seg.6 | length 62.7
  Top Layer w0.254: REAPACK4.5 77.59,60.191 77.59,45.87 79.167,44.293 104.339,44.293 108.758,48.713 115.134,48.713 Se1Seg.6
SE1SEG4: REAPACK4.6 Se1Seg.7 | length 46.4
  Top Layer w0.254: v1(82.037,58.928) 82.037,57.831 83.944,55.925 119.716,55.925 Se1Seg.7
  Bottom Layer w0.254: REAPACK4.6 v1(82.037,58.928)
SE1SEG5: REAPACK4.7 Se1Seg.8 | length 97.4
  Bottom Layer w0.254: REAPACK4.7 77.567,55.088 77.567,45.69 79.675,43.582 133.269,43.582 138.883,49.195 139.924,49.195 140.838,50.11 140.838,51.735 137.943,54.631 126.132,54.631 Se1Seg.8
SE1SEG6: REAPACK4.8 Se1Seg.9 | length 50.3
  Bottom Layer w0.254: REAPACK4.8 80.652,52.063 104.45,52.063 105.104,51.409 125.45,51.409 Se1Seg.9
SE1SEG7: REAPACK4.9 Se1Seg.10 | length 52.4
  Bottom Layer w0.254: REAPACK4.9 103.923,51.308 104.476,50.755 127.336,50.755 Se1Seg.10
SELCHIP0: U6.16
SELCHIP1: U6.15
SELCHIP2: U6.14
SELCHIP3: U6.13
SELCHIP4: U6.12
SELCHIP5: U6.11
SELSEG0: DS0.1 DS1.1 DS2.1 DS3.1 DS4.1 DS5.1 | length 64.8
  Bottom Layer w0.254: DS0.1 86.863,70.557 94.941,70.557 DS1.1 98.981,68.853 104.77,68.853 106.523,70.606 DS2.1 111.654,66.594 111.806,66.594 DS3.1 118.105,70.557 126.183,70.557 DS4.1 131.085,67.991 134.708,67.991 137.765,71.049 DS5.1
SELSEG1: DS0.2 DS1.2 DS2.2 DS3.2 DS4.2 DS5.2 | length 64.1
  Bottom Layer w0.254: DS0.2 88.768,72.893 97.582,72.893 98.014,72.462 DS1.2 99.182,70.557 104.891,70.557 105.126,70.792 105.126,72.462 105.558,72.893 108.149,72.893 108.428,72.614 DS2.2 109.596,70.557 114.626,70.557 115.311,71.242 115.311,72.462 115.743,72.893 117.851,72.893 118.283,72.462 118.283,72.284 DS3.2 120.01,72.893 128.265,72.893 128.697,72.462 128.697,72.284 DS4.2 130.424,70.557 136.133,70.557 136.368,70.792 136.368,72.462 136.8,72.893 139.238,72.893 139.67,72.462 DS5.2
SELSEG2: DS0.3 DS1.3 DS2.3 DS3.3 DS4.3 DS5.3 | length 61.1
  Top Layer w0.254: DS0.3 91.321,73.541 98.103,73.541 DS1.3 ; 119.071,73.554 119.071,73.401 DS3.3
  Bottom Layer w0.254: DS1.3 101.9,73.706 108.352,73.706 DS2.3 112.162,73.554 119.223,73.554 ; 119.071,73.401 119.223,73.554 ; DS5.3 139.619,73.681 133.117,73.681 DS4.3 129.332,73.554 119.223,73.554
SELSEG3: DS0.4 DS1.4 DS2.4 DS3.4 DS4.4 DS5.4 | length 81.2
  Top Layer w0.254: DS0.4 92.572,72.887 94.236,72.887 94.941,72.182 94.941,70.836 95.214,70.563 100.662,70.563 DS1.4 103.45,73.351 110.612,73.351 DS2.4 115.46,74.947 119.43,74.947 DS3.4 124.735,73.808 141.397,73.808 DS5.4 144.648,72.893 146.122,72.893 146.553,72.462 146.553,69.922 146.299,69.668 135.123,69.668 DS4.4
SELSEG4: DS0.5 DS1.5 DS2.5 DS3.5 DS4.5 DS5.5 | length 59.1
  Top Layer w0.254: DS0.5 93.315,71.049 94.455,69.909 101.913,69.909 DS1.5 105.507,69.947 112.365,69.947 DS2.5 116.226,69.642 122.474,69.642 DS3.5 125.725,72.893 133.803,72.893 DS4.5 136.139,70.557 144.217,70.557 DS5.5
SELSEG5: DS0.6 DS1.6 DS2.6 DS3.6 DS4.6 DS5.6 | length 69.9
  Top Layer w0.254: DS0.6 94.915,58.695 104.212,58.695 ; DS1.6 104.212,58.695 ; v1(112.746,63.241) 114.143,61.844 DS2.6 110.739,56.891 106.015,56.891 104.212,58.695 ; 122.271,62.352 122.5,62.352 DS3.6 124.557,62.149 v1(124.963,62.556) ; v1(132.71,62.556) DS4.6 v1(137.384,62.708)
  Bottom Layer w0.254: v1(112.746,63.241) 112.746,64.13 113.711,65.096 119.756,65.096 122.5,62.352 ; v1(124.963,62.556) v1(132.71,62.556) ; v1(137.384,62.708) 142.972,62.708 DS5.6
SELSEG6: DS0.7 DS1.7 DS2.7 DS3.7 DS4.7 DS5.7 | length 70.6
  Top Layer w0.254: DS0.7 96.82,65.705 100.859,65.705 101.824,64.74 DS1.7 103.018,61.489 104.491,61.489 105.073,60.907 105.073,59.649 106.396,58.327 110.27,58.327 DS2.7 111.719,60.814 111.719,63.927 112.06,64.268 113.827,64.268 v1(114.448,63.648)
  Bottom Layer w0.254: v1(114.448,63.648) 119.299,63.648 DS3.7 123.82,61.463 131.898,61.463 DS4.7 134.234,61.463 142.312,61.463 DS5.7
SELSEG7: DS0.8 DS1.8 DS2.8 DS3.8 DS4.8 DS5.8 | length 57.2
  Bottom Layer w0.254: DS0.8 90.673,59.127 98.751,59.127 DS1.8 101.316,58.898 108.936,58.898 DS2.8 111.654,58.974 119.426,58.974 DS3.8 121.915,59.127 129.993,59.127 DS4.8 132.329,59.127 140.407,59.127 DS5.8
T0: J3_0.5 P3.7 REAPACK3.6 U1.14 | length 18
  Top Layer w0.254: P3.7 47.874,35.682 U1.14
  Bottom Layer w0.254: J3_0.5 REAPACK3.6 40.513,31.242 P3.7
T1: J3_0.6 P3.8 REAPACK3.7 U1.15 | length 18
  Top Layer w0.254: P3.8 47.976,33.244 U1.15
  Bottom Layer w0.254: J3_0.6 REAPACK3.7 40.513,28.702 P3.8
TXD: J3_0.2 P3.4 REAPACK3.3 U1.11 U2.10 | length 55
  Top Layer w0.254: U2.10 37.181,6.38 37.181,39.594 REAPACK3.3 ; P3.4 45.197,40.625 45.197,41.133 U1.11
  Bottom Layer w0.254: J3_0.2 REAPACK3.3 40.513,38.862 P3.4
VCC: C10.1 C11.1 C12.1 C22.1 DS0.9 DS1.9 DS2.9 DS3.9 DS4.9 DS5.9 EA\VP.3 ISP.4 J813_Vcc.1 JBeepVcc.1 JLEDVcc.1 JROMVcc.1 Key1.2 Key1.4 LCD.1 P0.1 P1.1 P2.1 P3.1 Power1.1 Power3.1 R1.1 REAPACK0.1 REAPACK1.1 REAPACK2.1 REAPACK3.1 U1.40 VCCpower1.1 VCCpower1.2 VCCpower1.3 VCCpower1.4 VCCpower2.1 VCCpower2.2 VCCpower2.3 | length 446.9
  Top Layer w1: Power1.1 5.588,77.216 C12.1 ; Key1.2 9.52,70.607 9.52,64.394 J813_Vcc.1 ; Key1.4 15.113,76.962 C22.1 17.166,79.015 17.166,82.402 Power3.1 ; LCD.1 41.402,85.217 P0.1 ; REAPACK3.1 40.864,43.591 40.864,4.542 42.693,2.713 48.255,2.713 49.322,3.78 49.322,7.285 VCCpower2.1 ; REAPACK1.1 41.524,70.48 41.524,48.392 P3.1 ; v1(48.506,71.877) v1@48.506,71.993 ; 49.012,71.487 v1@48.506,71.993 ; DS0.9 v1(87.6,63.826) 84.16,67.266 84.16,72.97 85.187,73.997 88.627,73.997 89.937,75.306 89.937,81.005 VCCpower1.1 ; JLEDVcc.1 JROMVcc.1 ; DS1.9 v1(98.014,63.826) ; DS3.9 118.842,59.033 122.304,55.571 133.015,55.571 133.93,54.656 138.527,54.656 139.67,55.799 DS5.9 139.67,63.114 138.451,64.334 130.78,64.334 129.256,62.81 DS4.9 ; v1@48.506,71.993 v1(48.506,72.136) 48.506,76.843 ; 48.506,76.843 48.506,77.597 P1.1 48.506,76.843
  Bottom Layer w1: C12.1 Key1.2 Key1.4 ; ISP.4 10.16,61.849 J813_Vcc.1 ; C22.1 17.907,75.184 R1.1 C10.1 31.369,75.184 ; LCD.1 31.369,75.184 ; REAPACK3.1 39.594,47.087 P3.1 ; P0.1 49.458,83.257 74.477,83.257 C11.1 79.248,81.28 VCCpower1.4 VCCpower1.3 VCCpower1.2 VCCpower1.1 89.463,81.479 97.227,81.479 EA\VP.3 101.722,82.55 101.849,82.423 JBeepVcc.1 ; v1(48.506,71.877) 57.281,71.877 59.562,69.596 U1.40 REAPACK0.1 ; v1(48.506,72.136) REAPACK1.1 40.246,72.136 37.198,75.184 31.369,75.184 ; VCCpower2.1 VCCpower2.2 VCCpower2.3 63.292,16.175 65.197,16.175 REAPACK2.1 72.263,18.669 P2.1 76.205,14.727 86.766,14.727 JROMVcc.1 ; v1(87.6,63.826) v1(98.014,63.826) 106.037,63.826 108.428,61.435 ; DS2.9 108.428,61.435 ; DS3.9 118.842,61.181 118.182,61.841 108.834,61.841 108.428,61.435
WR: J3_0.7 P3.9 REAPACK3.8 U1.16 | length 18
  Top Layer w0.254: P3.9 47.874,30.602 U1.16
  Bottom Layer w0.254: J3_0.7 REAPACK3.8 40.513,26.162 P3.9
pads on no net: ISP.6 ISP.7 ISP.8 J_RST.1 KeyJump.1 KeyJump.2 Serial1.9 Serial1.10 Serial1.11 U2.11 U2.12 U2.13 U2.14 U6.10

## Keep-outs
Keep-Out Layer:
  lines w0.3: 0,0 147.4,0 147.4,87.4 0,87.4 0,0

## Text inside footprints (layer, text, board x,y; h text height)
ISP: Top Overlay "2" at 6.477,63.754 h1.1 r270; Top Overlay "1" at 3.937,63.246 h1.1 r270; Top Overlay "9" at 3.937,49.53 h1.1 r270; Top Overlay "10" at 6.477,49.53 h1.1 r270
Serial1: Top Overlay "1" at 22.122,10.847 h1.1 r90; Top Overlay "5" at 22.122,21.677 h1.1 r90; Top Overlay "9" at 12.722,20.292 h1.1 r90; Top Overlay "6" at 12.722,11.982 h1.1 r90